# EAGLE board board (EAGLE 9.2.0)
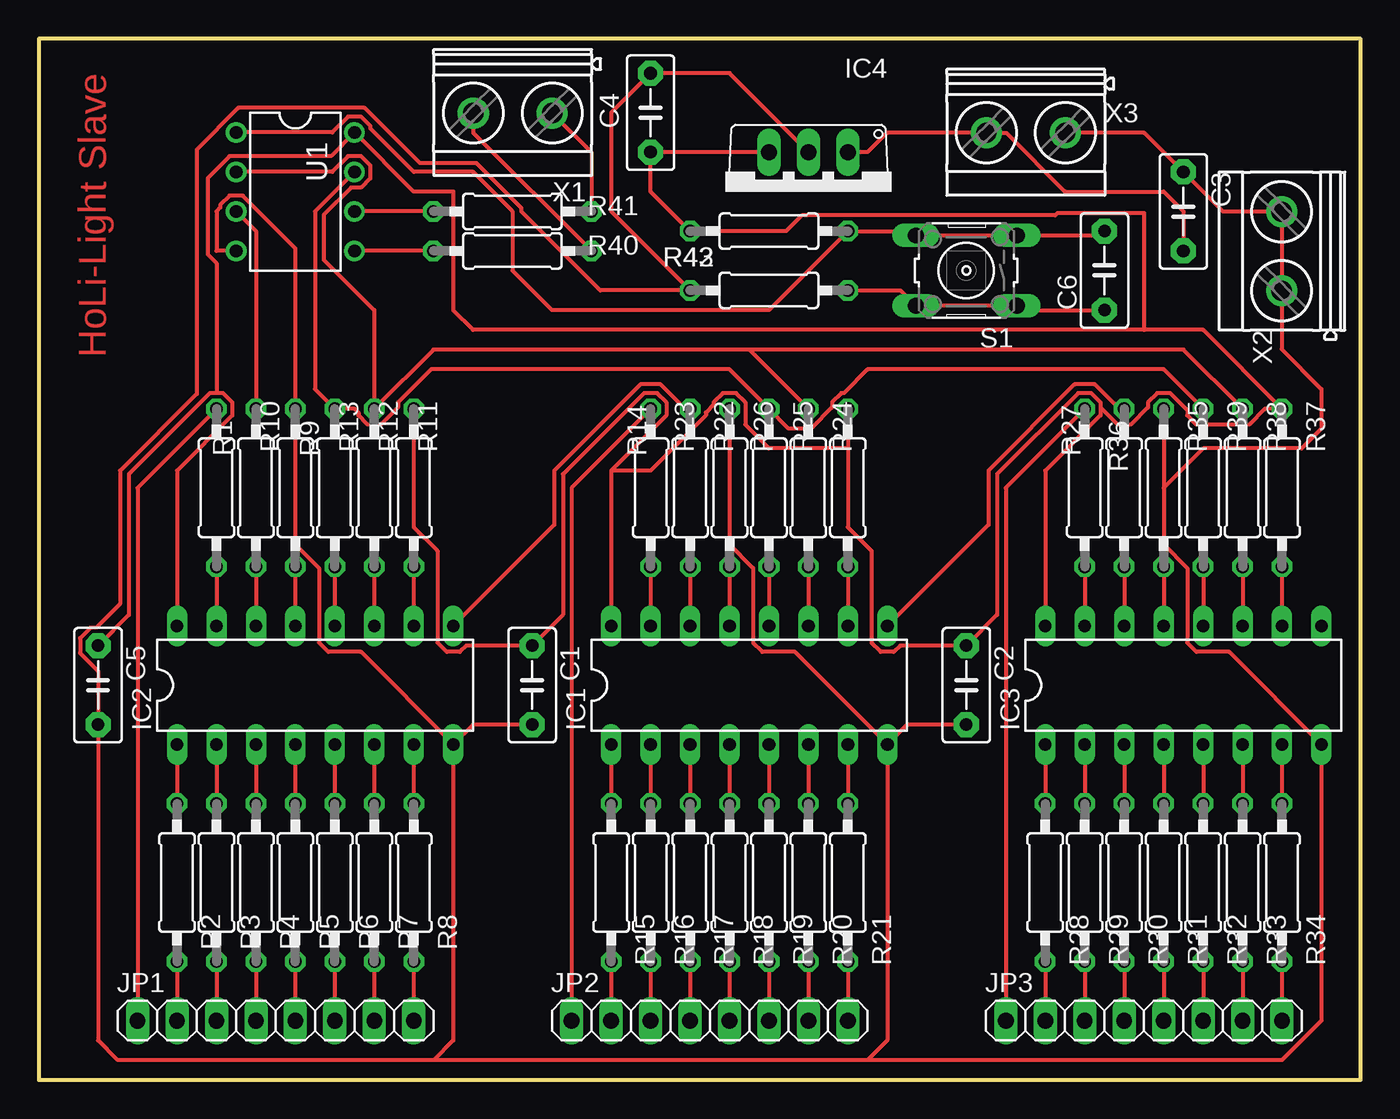
[diagram p0: board, top side]

Size 85.07 x 66.98 mm. Coordinates in mm from the lower left corner, seen from the top.
Outline: 0,0 85.07,0 85.07,66.98 0,66.98 0,0
Copper layers (1*16): Top 0.035mm / dielectric 1.5mm / Bottom 0.035mm
Design rules "default": minimum track width 6mil, minimum drill 0.35mm, track to track 6mil, track to pad 6mil, pad to pad 6mil, via to via 6mil, smd to smd 6mil, copper to edge 40mil, drill to drill 6mil, minimum pad ring 10mil, minimum via ring 8mil, stop-mask expansion 4mil, vias tented up to drill 0mil, thermal gap 10mil

## Footprints (pad centres in the part's own frame; a part is rotated, then mirrored left to right if it is on the bottom)
C5B3 = drill 0.813 pad 1.6 octagon: 1 -2.54,0; 2 2.54,0
DIL16 = drill 0.813 long: 1 -8.89,-3.81; 2 -6.35,-3.81; 3 -3.81,-3.81; 4 -1.27,-3.81; 5 1.27,-3.81; 6 3.81,-3.81; 7 6.35,-3.81; 8 8.89,-3.81; 9 8.89,3.81; 10 6.35,3.81; 11 3.81,3.81; 12 1.27,3.81; 13 -1.27,3.81; 14 -3.81,3.81; 15 -6.35,3.81; 16 -8.89,3.81
TO220V = drill 1.016 long: 1 -2.54,-2.54; 2 0,-2.54; 3 2.54,-2.54
1X08 = drill 1.016 long: 1 -8.89,0; 2 -6.35,0; 3 -3.81,0; 4 -1.27,0; 5 1.27,0; 6 3.81,0; 7 6.35,0; 8 8.89,0
0207/10 = drill 0.813 octagon: 1 -5.08,0; 2 5.08,0
B3F-10XX = drill 1.016 long: 1 -3.251,2.261; 2 3.251,2.261; 3 -3.251,-2.261; 4 3.251,-2.261
PDIP08_300MIL = drill 0.813: 1 -3.81,-3.81; 2 -1.27,-3.81; 3 1.27,-3.81; 4 3.81,-3.81; 5 3.81,3.81; 6 1.27,3.81; 7 -1.27,3.81; 8 -3.81,3.81
MKDSN1,5/2-5,08 = drill 1.3 pad 2: 1 -2.561,0.025; 2 2.519,0.025

## Placement (x,y rotation side)
C1  100n  [C5B3]  31.75,25.4 270 top
C2  100n  [C5B3]  59.69,25.4 270 top
C3  100n  [C5B3]  73.66,55.88 270 top
C4  47n  [C5B3]  39.37,62.23 270 top
C5  100n  [C5B3]  3.81,25.4 270 top
C6  100n  [C5B3]  68.58,52.07 90 top
IC1  74HC595N  [DIL16]  45.72,25.4 0 top
IC2  74HC595N  [DIL16]  17.78,25.4 0 top
IC3  74HC595N  [DIL16]  73.66,25.4 0 top
IC4  7805TV  [TO220V]  49.53,57.15 180 top
JP1  [1X08]  15.24,3.81 0 top
JP2  [1X08]  43.18,3.81 0 top
JP3  [1X08]  71.12,3.81 0 top
R1  200  [0207/10]  11.43,38.1 90 top
R2  200  [0207/10]  8.89,12.7 270 top
R3  200  [0207/10]  11.43,12.7 270 top
R4  200  [0207/10]  13.97,12.7 270 top
R5  200  [0207/10]  16.51,12.7 270 top
R6  200  [0207/10]  19.05,12.7 270 top
R7  200  [0207/10]  21.59,12.7 270 top
R8  200  [0207/10]  24.13,12.7 270 top
R9  10K  [0207/10]  16.51,38.1 270 top
R10  1K  [0207/10]  13.97,38.1 270 top
R11  10K  [0207/10]  24.13,38.1 270 top
R12  1K  [0207/10]  21.59,38.1 270 top
R13  1K  [0207/10]  19.05,38.1 270 top
R14  200  [0207/10]  39.37,38.1 90 top
R15  200  [0207/10]  36.83,12.7 270 top
R16  200  [0207/10]  39.37,12.7 270 top
R17  200  [0207/10]  41.91,12.7 270 top
R18  200  [0207/10]  44.45,12.7 270 top
R19  200  [0207/10]  46.99,12.7 270 top
R20  200  [0207/10]  49.53,12.7 270 top
R21  200  [0207/10]  52.07,12.7 270 top
R22  10K  [0207/10]  44.45,38.1 270 top
R23  1K  [0207/10]  41.91,38.1 270 top
R24  10K  [0207/10]  52.07,38.1 270 top
R25  1K  [0207/10]  49.53,38.1 270 top
R26  1K  [0207/10]  46.99,38.1 270 top
R27  200  [0207/10]  67.31,38.1 90 top
R28  200  [0207/10]  64.77,12.7 270 top
R29  200  [0207/10]  67.31,12.7 270 top
R30  200  [0207/10]  69.85,12.7 270 top
R31  200  [0207/10]  72.39,12.7 270 top
R32  200  [0207/10]  74.93,12.7 270 top
R33  200  [0207/10]  77.47,12.7 270 top
R34  200  [0207/10]  80.01,12.7 270 top
R35  10K  [0207/10]  72.39,38.1 270 top
R36  1K  [0207/10]  69.85,38.1 270 top
R37  10K  [0207/10]  80.01,38.1 270 top
R38  1K  [0207/10]  77.47,38.1 270 top
R39  1K  [0207/10]  74.93,38.1 270 top
R40  500  [0207/10]  30.48,53.34 180 top
R41  500  [0207/10]  30.48,55.88 180 top
R42  1K  [0207/10]  46.99,54.61 0 top
R43  10K  [0207/10]  46.99,50.8 0 top
S1  [B3F-10XX]  59.69,52.07 180 top
U1  ATTINY85-20P  [PDIP08_300MIL]  16.51,57.15 270 top
X1  MKDSN1,5/2-5,08  [MKDSN1,5/2-5,08]  30.48,62.23 180 top
X2  MKDSN1,5/2-5,08  [MKDSN1,5/2-5,08]  80.01,53.34 90 top
X3  MKDSN1,5/2-5,08  [MKDSN1,5/2-5,08]  63.5,60.96 180 top

## Library data of the parts
C1-C6 = capacitor-wima
IC1-IC3 = 74xx-eu
IC4 = linear
JP1-JP3 = Connector; CATEGORY: CONNECTOR; SUB-CATEGORY: PIN-HEADER
R1-R43 = resistor
S1 = switch-omron; MPN: B3F-1000; OC_FARNELL: 176432; OC_NEWARK: 36M3542
U1 = attiny25_45_85
X1-X3 = con-phoenix-508

## Nets
+5V: C1.1 C2.1 C4.2 C5.1 IC1.16 IC2.16 IC3.16 IC4.3 R11.1 R24.1 R37.1 R42.1 U1.8
GND: C1.2 C2.2 C3.1 C4.1 C5.2 IC1.8 IC2.8 IC3.8 IC4.2 R9.1 R22.1 R35.1 R43.1 U1.4 X2.1 X2.2 X3.1
N$1: IC2.15 R1.1
N$2: IC2.1 R2.1
N$3: IC2.2 R3.1
N$4: IC2.3 R4.1
N$5: IC2.4 R5.1
N$6: IC2.5 R6.1
N$7: IC2.6 R7.1
N$8: IC2.7 R8.1
N$9: IC2.13 R9.2
N$10: IC2.14 R10.2
N$11: IC2.11 R12.2
N$12: IC2.10 R11.2
N$13: IC2.12 R13.2
N$14: JP1.1 R1.2
N$15: JP1.2 R2.2
N$16: JP1.3 R3.2
N$17: JP1.4 R4.2
N$18: JP1.5 R5.2
N$19: JP1.6 R6.2
N$20: JP1.7 R7.2
N$21: JP1.8 R8.2
N$22: IC1.15 R14.1
N$23: IC1.1 R15.1
N$24: IC1.2 R16.1
N$25: IC1.3 R17.1
N$26: IC1.4 R18.1
N$27: IC1.5 R19.1
N$28: IC1.6 R20.1
N$29: IC1.7 R21.1
N$30: IC1.13 R22.2
N$31: IC1.14 R23.2
N$32: IC1.11 R25.2
N$33: IC1.10 R24.2
N$34: IC1.12 R26.2
N$35: JP2.1 R14.2
N$36: JP2.2 R15.2
N$37: JP2.3 R16.2
N$38: JP2.4 R17.2
N$39: JP2.5 R18.2
N$40: JP2.6 R19.2
N$41: JP2.7 R20.2
N$42: JP2.8 R21.2
N$43: IC3.15 R27.1
N$44: IC3.1 R28.1
N$45: IC3.2 R29.1
N$46: IC3.3 R30.1
N$47: IC3.4 R31.1
N$48: IC3.5 R32.1
N$49: IC3.6 R33.1
N$50: IC3.7 R34.1
N$51: IC3.13 R35.2
N$52: IC3.14 R36.2
N$53: IC3.11 R38.2
N$54: IC3.10 R37.2
N$55: IC3.12 R39.2
N$56: JP3.1 R27.2
N$57: JP3.2 R28.2
N$58: JP3.3 R29.2
N$59: JP3.4 R30.2
N$60: JP3.5 R31.2
N$61: JP3.6 R32.2
N$62: JP3.7 R33.2
N$63: JP3.8 R34.2
N$64: IC2.9 R23.1
N$65: IC1.9 R36.1
N$66: R40.1 X1.2
N$67: R12.1 R25.1 R38.1 U1.2
N$68: R13.1 R26.1 R39.1 U1.7
N$69: R40.2 U1.5
N$70: R41.2 U1.6
N$71: R41.1 X1.1
N$72: C3.2 IC4.1 X3.2
N$73: R10.1 U1.3
N$74: C6.1 R43.2 S1.1 S1.2
N$75: C6.2 R42.2 S1.3 S1.4 U1.1

## Tracks (layer width: path | path; a pad name or v marks a point on that pad's centre or on a via)
+5V
  Top 0.254: 11.43,44.2 11.01,44.2 5.79,38.98 5.79,29.92 C5.1 | 11.43,44.2 11.85,44.2 12.45,43.6 12.45,42.76 8.89,39.2 IC2.16 | 36.83,39.2 IC1.16 | 36.83,39.2 40.39,42.76 40.39,43.6 39.79,44.2 38.95,44.2 33.73,38.98 33.73,29.92 C1.1 27.5,27.94 27.09,27.53 26.25,27.53 25.65,28.13 25.65,34.04 24.13,35.56 R11.1 | 68.33,43.18 68.33,43.6 67.73,44.2 66.89,44.2 61.67,38.98 61.67,29.92 C2.1 55.44,27.94 55.03,27.53 54.19,27.53 53.59,28.13 53.59,34.04 52.07,35.56 52.07,40.64 | 68.33,43.18 68.33,42.76 64.77,39.2 IC3.16 | R24.1 52.07,40.64 | 68.33,43.18 68.41,43.18 69.43,42.16 70.27,42.16 71.37,43.27 71.37,43.6 71.97,44.2 72.81,44.2 73.91,43.09 73.91,42.76 74.51,42.16 77.89,42.16 78.91,43.18 R37.1 74.93,48.26 71.12,48.26 | 71.12,48.26 27.94,48.26 26.67,49.53 26.67,57.15 24.13,57.15 U1.8 18.8,59.44 12.28,59.44 10.87,58.03 10.87,53.11 11.43,52.55 11.43,44.2 | IC4.3 C4.2 39.37,57.15 R42.1 48.09,54.61 49.11,55.63 65.42,55.63 65.56,55.77 71.12,55.77 71.12,48.26 | 36.83,39.2 39.37,39.2 42.93,42.76 42.93,42.93 43.43,43.43 43.43,43.6 44.03,44.2 44.87,44.2 45.47,43.6 45.47,42.16 46.99,40.64 52.07,40.64
GND
  Top 0.254: 25.4,1.27 5.08,1.27 3.81,2.54 C5.2 3.81,26.31 2.65,27.46 2.65,28.42 3.33,29.1 3.7,29.1 5.23,30.63 5.23,39.21 10.16,44.14 10.16,59.86 12.84,62.53 20.97,62.53 24.53,58.98 28.17,58.98 31.04,56.11 31.04,55.88 36.12,50.8 R43.1 36.83,55.88 36.83,62.23 C4.1 44.45,64.77 IC4.2 | 25.4,1.27 26.67,2.54 IC2.8 | 53.34,1.27 25.4,1.27 | 53.34,1.27 54.61,2.54 IC1.8 | 53.34,1.27 80.01,1.27 82.55,3.81 IC3.8 76.61,27.53 74.51,27.53 73.91,28.13 73.91,32.93 72.39,34.46 72.39,38.1 | IC2.8 27.94,22.86 C1.2 | IC1.8 55.88,22.86 C2.2 | R22.1 44.45,34.46 45.97,32.93 45.97,28.13 46.57,27.53 48.67,27.53 IC1.8 | R35.1 72.39,38.1 | IC2.8 20.73,27.53 18.63,27.53 18.03,28.13 18.03,32.93 16.51,34.46 R9.1 16.51,53.51 13.12,56.9 12.28,56.9 11.68,56.3 11.68,56.13 11.43,55.88 11.43,53.34 U1.4 | 72.39,38.1 74.93,40.64 81.28,40.64 82.55,41.91 82.55,44.45 79.98,47.02 X2.1 X2.2 76.22,55.86 C3.1 71.14,60.94 X3.1
N$1
  Top 0.254: R1.1 IC2.15
N$2
  Top 0.254: IC2.1 R2.1
N$3
  Top 0.254: IC2.2 R3.1
N$4
  Top 0.254: IC2.3 R4.1
N$5
  Top 0.254: IC2.4 R5.1
N$6
  Top 0.254: IC2.5 R6.1
N$7
  Top 0.254: IC2.6 R7.1
N$8
  Top 0.254: IC2.7 R8.1
N$9
  Top 0.254: R9.2 IC2.13
N$10
  Top 0.254: R10.2 IC2.14
N$11
  Top 0.254: R12.2 IC2.11
N$12
  Top 0.254: R11.2 IC2.10
N$13
  Top 0.254: R13.2 IC2.12
N$14
  Top 0.254: R1.2 6.35,38.1 JP1.1
N$15
  Top 0.254: R2.2 JP1.2
N$16
  Top 0.254: R3.2 JP1.3
N$17
  Top 0.254: R4.2 JP1.4
N$18
  Top 0.254: R5.2 JP1.5
N$19
  Top 0.254: R6.2 JP1.6
N$20
  Top 0.254: R7.2 JP1.7
N$21
  Top 0.254: R8.2 JP1.8
N$22
  Top 0.254: R14.1 IC1.15
N$23
  Top 0.254: IC1.1 R15.1
N$24
  Top 0.254: IC1.2 R16.1
N$25
  Top 0.254: IC1.3 R17.1
N$26
  Top 0.254: IC1.4 R18.1
N$27
  Top 0.254: IC1.5 R19.1
N$28
  Top 0.254: IC1.6 R20.1
N$29
  Top 0.254: IC1.7 R21.1
N$30
  Top 0.254: R22.2 IC1.13
N$31
  Top 0.254: R23.2 IC1.14
N$32
  Top 0.254: R25.2 IC1.11
N$33
  Top 0.254: R24.2 IC1.10
N$34
  Top 0.254: R26.2 IC1.12
N$35
  Top 0.254: R14.2 34.29,38.1 JP2.1
N$36
  Top 0.254: R15.2 JP2.2
N$37
  Top 0.254: R16.2 JP2.3
N$38
  Top 0.254: R17.2 JP2.4
N$39
  Top 0.254: R18.2 JP2.5
N$40
  Top 0.254: R19.2 JP2.6
N$41
  Top 0.254: R20.2 JP2.7
N$42
  Top 0.254: R21.2 JP2.8
N$43
  Top 0.254: R27.1 IC3.15
N$44
  Top 0.254: IC3.1 R28.1
N$45
  Top 0.254: IC3.2 R29.1
N$46
  Top 0.254: IC3.3 R30.1
N$47
  Top 0.254: IC3.4 R31.1
N$48
  Top 0.254: IC3.5 R32.1
N$49
  Top 0.254: IC3.6 R33.1
N$50
  Top 0.254: IC3.7 R34.1
N$51
  Top 0.254: R35.2 IC3.13
N$52
  Top 0.254: R36.2 IC3.14
N$53
  Top 0.254: R38.2 IC3.11
N$54
  Top 0.254: R37.2 IC3.10
N$55
  Top 0.254: R39.2 IC3.12
N$56
  Top 0.254: R27.2 62.23,38.1 JP3.1
N$57
  Top 0.254: R28.2 JP3.2
N$58
  Top 0.254: R29.2 JP3.3
N$59
  Top 0.254: R30.2 JP3.4
N$60
  Top 0.254: R31.2 JP3.5
N$61
  Top 0.254: R32.2 JP3.6
N$62
  Top 0.254: R33.2 JP3.7
N$63
  Top 0.254: R34.2 JP3.8
N$64
  Top 0.254: IC2.9 33.17,35.71 33.17,39.21 38.72,44.76 40.02,44.76 41.6,43.18 R23.1
N$65
  Top 0.254: IC1.9 61.11,35.71 61.11,39.21 66.66,44.76 67.96,44.76 69.54,43.18 R36.1
N$66
  Top 0.254: R40.1 27.96,60.94 X1.2
N$67
  Top 0.254: 45.72,46.99 25.4,46.99 R12.1 21.59,49.53 18.34,52.78 18.34,55.65 20.09,57.4 20.74,57.4 21.34,58 21.34,58.84 20.74,59.44 19.9,59.44 18.88,58.42 U1.2 | R25.1 45.72,46.99 | 45.72,46.99 73.66,46.99 R38.1
N$68
  Top 0.254: R39.1 72.39,45.72 53.34,45.72 51.82,44.2 51.65,44.2 51.05,43.6 51.05,43.27 49.7,41.91 48.26,41.91 R26.1 44.45,45.72 25.23,45.72 23.11,43.6 23.11,43.27 22.01,42.16 21.84,42.16 21.59,41.91 21.34,42.16 21.17,42.16 20.57,42.76 20.57,42.93 20.32,43.18 R13.1 17.78,44.45 17.78,55.88 U1.7
N$69
  Top 0.254: R40.2 U1.5
N$70
  Top 0.254: R41.2 U1.6
N$71
  Top 0.254: R41.1 35.56,59.69 X1.1
N$72
  Top 0.254: IC4.1 53.34,59.69 54.59,60.94 X3.2 62.26,60.94 66.04,57.15 72.39,57.15 73.66,55.88 C3.2
N$73
  Top 0.254: U1.3 13.97,54.61 R10.1
N$74
  Top 0.254: C6.1 63.22,49.53 S1.1 S1.2 55.45,50.8 R43.2
N$75
  Top 0.254: U1.1 18.88,60.96 19.9,61.98 20.74,61.98 21.34,61.38 21.34,61.21 24.13,58.42 27.94,58.42 30.48,55.88 30.48,52.07 33.02,49.53 46.99,49.53 R42.2 56.16,54.61 S1.4 S1.3 68.3,54.33 C6.2

## Text on the board
Top: HoLi-Light Slave